# Altium PCB LPKF_ISEN_MAXSIZE_18-05-2016.PCBDOC
Units mm, origin at the board's own origin, x right, y up, seen from the top; angles counter-clockwise.
Board outline 299.72 x 199.9 mm, 2 copper layers (Top Layer, Bottom Layer); 32 components, 16 nets, 110 pads, 0 vias.
Unrouted connection lines stored in the file: 4.
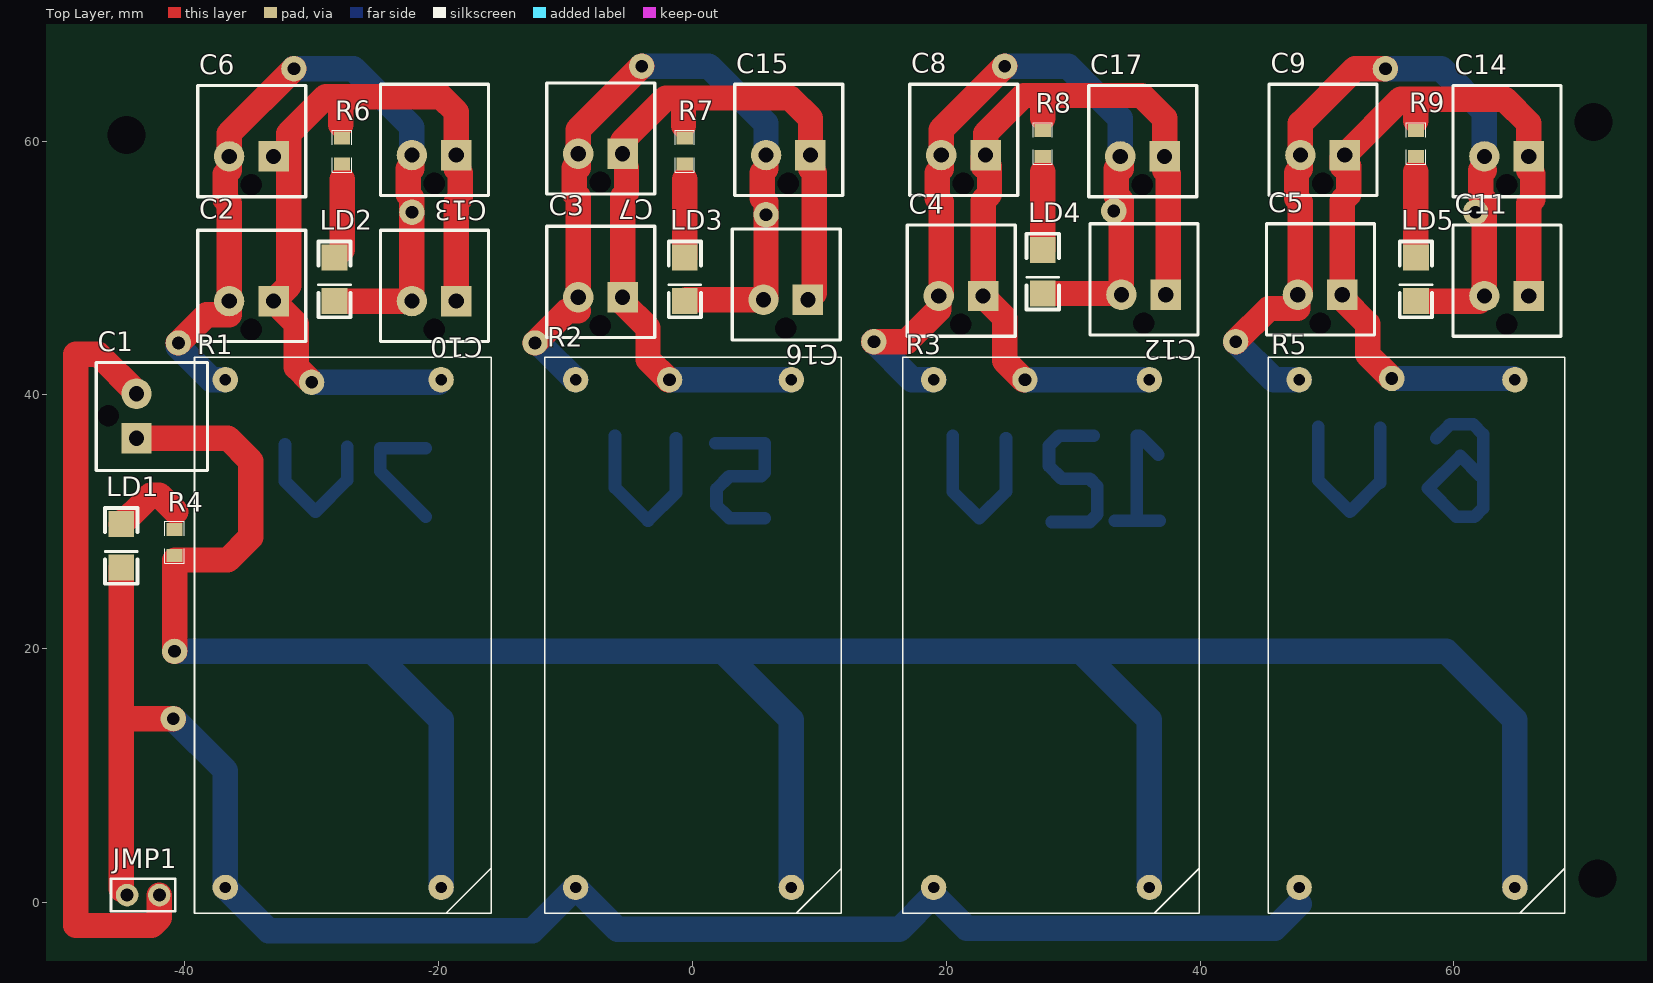
[diagram p0: Top Layer view]
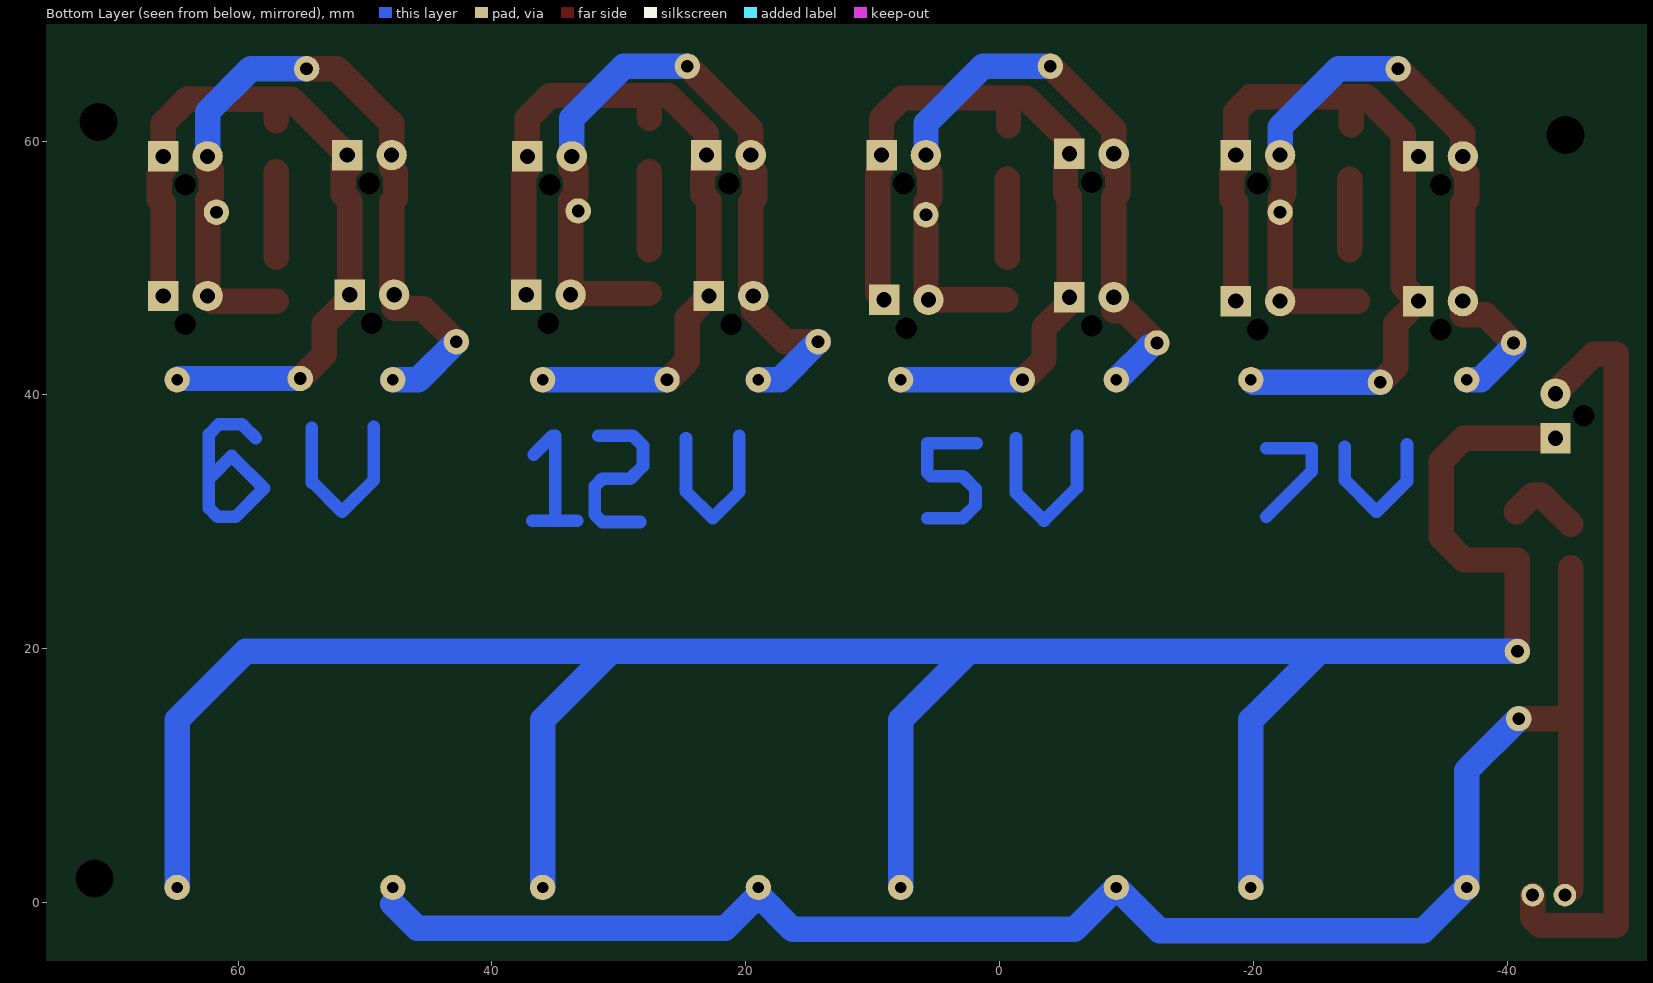
[diagram p1: Bottom Layer view, seen from below]

## Layer stack, top to bottom
Top Solder: solder mask 0.0102, Solder Resist, Dk 3.5
Top Layer: signal copper 0.0356
Dielectric1: dielectric 0.32, FR-4, Dk 4.8
Bottom Layer: signal copper 0.0356
Bottom Solder: solder mask 0.0102, Solder Resist, Dk 3.5

## Board outline
-141.655,-46.39 158.065,-46.39 158.065,153.508 -141.655,153.508

## Design rules (kind name [scope] priority, off if disabled: settings)
Clearance Clearance_bottom_polygon [OnLayer('Bottom Layer') Or OnLayer('Multi-Layer') vs OnLayer('Bottom Layer')  And  InPoly] p1: gap=0.508
Clearance Clearance_top_polygon [OnLayer('Top Layer')  Or OnLayer('Multi-Layer') vs OnLayer('Top Layer') And InPoly] p2: gap=0.508
Clearance Clearance_bottom [OnLayer('Bottom Layer') Or OnLayer('Multi-Layer') vs OnLayer('Bottom Layer')  And Not InPoly] p3: gap=0.203
Clearance Clearance_top [OnLayer('Top Layer')  Or OnLayer('Multi-Layer') vs OnLayer('Top Layer') And Not InPoly] p4: gap=0.203
Clearance Clearance_pad_to_pad [OnLayer('Multi-Layer') vs OnLayer('Multi-Layer')] p5: gap=0.254
ComponentClearance ComponentClearance_bottom [OnLayer('Bottom Overlay') vs OnLayer('Bottom Overlay')] p1: gap=0 collisioncheckmode=3 verticalgap=0.254 showdistances=FALSE
ComponentClearance ComponentClearance_top [OnLayer('Top Overlay') vs OnLayer('Top Overlay')] p2: gap=0 collisioncheckmode=3 verticalgap=0.254 showdistances=FALSE
FabricationTestPointUsage TestPointUsage [All] p1: valid=0 allowmultiple=FALSE
FabricationTestpoint Testpoint [All] p1: side=3 testpointundercomponent=TRUE minsize=1.016 maxsize=2.54 preferedsize=1.524 minholesize=0 maxholesize=1.016 preferedholesize=0.813 testpointgrid=0.025 allowsidetop=TRUE allowsidebottom=TRUE usegrid=TRUE gridtolerance=0
HoleSize [All] p1: absolutevalues=TRUE maxlimit=25.4 minlimit=0.406 maxpercent=80.000 minpercent=20.000
MinimumAnnularRing [PadXSize_AllLayers = PadYSize_AllLayers] p1: minimumring=0.254
PermittedLayers [All] p1: toplayerpermitted=TRUE bottomlayerpermitted=TRUE
PolygonConnect [All] p1: connectstyle=Relief reliefconductorwidth=0.61 reliefentries=4 polygonreliefangle="90 Angle" airgapwidth=0.254
RoutingVias [All] p1: holewidth=0.406 width=0.813 viastyle="Through Hole" minholewidth=0.4 minwidth=0.8 maxholewidth=0.6 maxwidth=10
SMDToPlane [All] p1: distance=0
SolderMaskExpansion [All] p1: expansion=0.102
ViasUnderSMD [All] p1: allowed=FALSE
Width Width_botom_top [OnLayer('Bottom Layer') or OnLayer('Top Layer')] p1: maxlimit=254 minlimit=0.254 preferedwidth=0.813 minimp=50.000000 maximp=50.000000 favimp=50.000000
26 further rules are at their usual default settings.

## Components (designator, comment, footprint, x,y, rotation, side; value= is the part's Value field where it differs from the comment)
C1 "Embase" POWER__2 -43.8,36.6 r90 top
C2 "Embase" POWER__2 -33,47.4 r180 top
C3 "Embase" POWER__2 -5.5,47.7 r180 top
C4 "Embase" POWER__2 22.9,47.8 r180 top
C5 "Embase" POWER__2 51.2,47.9 r180 top
C6 "Embase" POWER__2 -33,58.8 r180 top
C7 "Embase" POWER__2 -5.5,59 r180 top
C8 "Embase" POWER__2 23.1,58.9 r180 top
C9 "Embase" POWER__2 51.4,58.9 r180 top
C10 "Embase" POWER__2 -18.6,47.4 r180 top
C11 "Embase" POWER__2 65.9,47.8 r180 top
C12 "Embase" POWER__2 37.3,47.9 r180 top
C13 "Embase" POWER__2 -18.6,58.9 r180 top
C14 "Embase" POWER__2 65.9,58.8 r180 top
C15 "Embase" POWER__2 9.3,58.9 r180 top
C16 "Embase" POWER__2 9.1,47.5 r180 top
C17 "Embase" POWER__2 37.2,58.8 r180 top
JMP1 "JUMPER2" JMP2-100 -42,0.6 r180 top
LD1 "Bleue" LED1206 -45,26.4 r90 top
LD2 "comment" LED1206 -28.2,47.4 r90 top
LD3 "comment" LED1206 -0.6,47.4 r90 top
LD4 "comment" LED1206 27.6,48 r90 top
LD5 "comment" LED1206 57,47.4 r90 top
R1 "Régulateur" RéGULATEUR -19.8,1.2 r180 top
R2 "Régulateur" Régulateur 7.8,1.2 r180 top
R3 "Régulateur" RéGULATEUR 36,1.2 r180 top
R4 "" 0805 -40.8,29.4 r270 top
R5 "Régulateur" RéGULATEUR 64.8,1.2 r180 top
R6 "RES" 0805 -27.6,58.2 r90 top
R7 "RES" 0805 -0.6,58.2 r90 top
R8 "RES" 0805 27.6,58.8 r90 top
R9 "RES" 0805 57,58.8 r90 top

## Footprints (in the part's own frame and the unit in brackets; to place one, negate y for a bottom-side part, rotate by r counter-clockwise, add the part's x,y. Pads: shape width x height; smd on the part's side, far side on the other; paste and mask are expansions set on the pad)
0805 [mil]
  rect 40x50 smd: 1(0,0) 2(80,0)
  silkscreen extent -25,-30 105,30
JMP2-100 [mil]
  round 70 hole 40: 1(0,0) 2(100,0)
  silkscreen extent -50,-50 150,50
LED1206 [mil]
  rect 80x80 smd: A(135,0) K(0,0)
  silkscreen extent -50,-50 185,50
POWER__2 [mm] "Embase 895-1836"
  rect 2.4x2.4 hole 1.2: 1(0,0)
  round 2.4 hole 1.2: 2(3.5,0)
  round 0 hole 1.7: 3(1.75,2.24)
  silkscreen extent -2.54,-5.59 5.97,3.18
RéGULATEUR [mm]
  round 2 hole 0.9: 1(0,0) 2(17,0) 3(17,-40) 4(0,-40)
  silkscreen extent -3.94,-41.78 19.43,2.03
Régulateur [mm]
  round 2 hole 0.9: 1(0,0) 2(17,0) 3(17,-40) 4(0,-40)
  silkscreen extent -3.94,-41.78 19.43,2.03

## Part data
C1 C2 C3 C4 C5 C6 C7 C8 C9 C10 C11 C12 C13 C14 C15 C16 C17: "Embase 2 broches"
JMP1: "cavalier 1 position"
LD1 LD2 LD3 LD4 LD5: library part LED, "LED 5mm/3mm/CMS"
R1 R2 R3 R5: "Régulateur de tension"
R4: library part RES, "resistance"
R6 R7 R8 R9: "resistance"

## Free pads (board coordinates)
  round 1.524 hole 3: 0(-44.6,60.5) 3(71.3,1.9) 4(71,61.5)
  round 2 hole 1: 4(-40.8,19.8) 9(-22.1,54.4) 11(5.8,54.2) 12(33.2,54.5) 13(61.7,54.4) 14(54.6,65.7) 15(24.6,65.9) 16(-31.397,65.703) 17(-4,65.9) 25(-40.9,14.5) 26(-30,41) 27(-1.8,41.2) 28(26.2,41.2) 29(55.1,41.3) 30(-40.497,44.1) 31(-12.4,44.1) 32(14.3,44.2) 33(42.8,44.2)

## Nets (pads, with @x,y where several pads share a name; then routed paths per layer and width w, separated by ;. In a path a pad name is that pad's centre, name@x,y a point inside that pad or via, vN(x,y) a via of type N, cw(c..) or ccw(c..) an arc to the next point about the centre after c; other vN are vias at no path point)
NetC1_1: C1.1 pad.4@-40.8,19.8 R1.1 R2.1 R3.1 R4.2 R5.1 | length 213.2
  Top Layer w2: C1.1 -36.6,36.6 -34.8,34.8 -34.8,28.8 -36.6,27 -40.8,27 pad.4@-40.8,19.8
  Bottom Layer w2: pad.4@-40.8,19.8 -25.2,19.8 ; R1.1 -19.8,14.4 -25.2,19.8 ; R2.1 7.8,14.4 2.4,19.8 ; R3.1 36,14.4 30.6,19.8 ; R5.1 64.8,14.4 59.4,19.8 30.6,19.8 ; -25.2,19.8 2.4,19.8 ; 2.4,19.8 30.6,19.8
NetC1_2: C1.2 JMP1.1 | length 59.9
  Top Layer w2: C1.2 -43.7,40.1 -46.8,43.2 -48.6,43.2 -48.6,-1.8 -42.6,-1.8 -42,-1.2 JMP1.1
NetJMP1_2: JMP1.2 LD1.K pad.25 | length 136.2
  Top Layer w2: JMP1.2@-45,1.06 -45,14.5 ; LD1.K -45,14.5 ; pad.25 -45,14.5
  Bottom Layer w2: pad.25 -36.8,10.4 -36.8,1.2 -33.4,-2.2 -12.6,-2.2 -9.2,1.2 -5.9,-2.1 16.3,-2.1 19,0.6 21.6,-2 45.9,-2 47.8,-0.1
NetLD1_A: LD1.A R4.1 | length 5.8
  Top Layer w2: LD1.A -44.229,30.6 -44.2,30.6 -42.7,32.1 -42,32.1 -40.7,30.8
NetLD2_A: LD2.A R6.1 | length 5.6
  Top Layer w2: LD2.A@-27.6,51.429 -27.6,57
NetLD3_A: LD3.A R7.1 | length 6.2
  Top Layer w2: LD3.A -0.6,57
NetLD4_A: LD4.A R8.1 | length 6.2
  Top Layer w2: LD4.A 27.6,57.6
NetLD5_A: LD5.A R9.1 | length 6.8
  Top Layer w2: LD5.A 57,57.6
R1+: C2.1 C6.1 C10.1 C13.1 pad.26 R1.4 R6.2 | length 63.3
  Top Layer w2: pad.26@-30.2,41.2 -31.2,42.2 -31.2,45.6 C2.1 -31.8,48.6 -31.8,60.6 -28.9,63.5 -27.7,63.5 ; -27.7,61.3 -27.7,63.5 ; C10.1 -18.6,55.203 -18.297,55.506 -18.297,57.51 -18.6,57.814 C13.1 -18.6,62.3 -19.8,63.5 -27.7,63.5
  Bottom Layer w2: pad.26 R1.4@-20,41
R1-: C2.2 C6.2 C10.2 C13.2 LD2.K pad.9 pad.16 pad.30 R1.2 | length 63.2
  Top Layer w2: pad.30 -38.283,46.314 -36.5,46.314 C2.2 -36.5,55.103 -36.803,55.406 -36.803,57.41 -36.5,57.714 C6.2 -36.5,60.6 pad.16 ; LD2.K C10.2 -22.1,55.506 -22.403,55.81 -22.403,57.814 -22.1,57.814 C13.2
  Bottom Layer w2: pad.30 -40.497,43.8 -37.897,41.2 -36.8,41.2 ; pad.16 -26.703,65.703 -22.1,61.1 C13.2
R2+: C3.1 C7.1 C15.1 C16.1 pad.27 R2.4 R7.2 | length 61.9
  Top Layer w2: C7.1 -5.5,60 -2.1,63.4 -0.7,63.4 ; C7.1@-5.197,57.914 -5.197,55.91 -5.5,55.606 C3.1 -5.5,47.3 -3.5,45.3 -3.5,42.8 pad.27@-1.9,41.2 ; -0.7,61.2 -0.7,63.4 ; C16.1@9.603,48.003 9.603,57.51 9.3,57.814 C15.1 9.3,61.8 7.7,63.4 -0.7,63.4
  Bottom Layer w2: pad.27 R2.4
R2-: C3.2 C7.2 C15.2 C16.2 LD3.K pad.11 pad.17 pad.31 R2.2 | length 60.8
  Top Layer w2: pad.31 -9.886,46.614 C3.2@-9,46.614 ; C3.2 -9,55.606 -9.303,55.91 -9.303,57.914 -9,57.914 C7.2 -9,60.9 pad.17 ; LD3.K@-0.5,47.5 C16.2 5.8,47.7 5.8,55.203 5.497,55.506 5.497,57.51 5.8,57.814 C15.2
  Bottom Layer w2: pad.31@-11.797,43.797 -9.2,41.2 ; pad.17 1.3,65.9 5.8,61.4 C15.2
R3+: C4.1 C8.1 C12.1 C17.1 pad.28 R3.4 R8.2 | length 63.2
  Top Layer w2: pad.28@26.1,41.2 24.6,42.7 24.6,46.1 C4.1 22.9,55.306 23.403,55.81 23.403,58.014 22.9,58.014 22.9,58.7 C8.1 23.1,60.6 26.1,63.6 27.6,63.6 ; 27.6,61.8 27.6,63.6 ; C12.1@37.503,47.9 37.503,57.41 37.2,57.714 C17.1 37.2,61.8 35.4,63.6 27.6,63.6
  Bottom Layer w2: pad.28 R3.4
R3-: C4.2 C8.2 C12.2 C17.2 LD4.K pad.12 pad.15 pad.32 R3.2 | length 65.2
  Top Layer w2: pad.32 16.886,44.2 19.4,46.714 C4.2 19.6,48 19.6,55.203 19.297,55.506 19.297,57.51 19.6,57.814 C8.2 19.6,60.9 pad.15 ; LD4.K 33.7,48 C12.2 33.8,55.306 33.397,55.71 33.397,57.814 33.8,57.814 33.8,58.7 C17.2
  Bottom Layer w2: pad.32 17.3,41.2 19,41.2 ; pad.15 29.6,65.9 33.7,61.8 C17.2
R4+: C5.1 C9.1 C11.1 C14.1 pad.29 R5.4 R9.2 | length 62.1
  Top Layer w2: pad.29@55,41.4 53.2,43.2 53.2,45.6 51.2,47.6 C5.1 51.2,55.306 51.703,55.81 51.703,58.014 51.2,58.014 51.2,58.7 C9.1 55.8,63.3 57,63.3 ; 57,61.6 57,63.3 ; C11.1 65.9,55.103 66.203,55.406 66.203,57.41 65.9,57.714 C14.1 65.9,61.4 64,63.3 57,63.3
  Bottom Layer w2: pad.29 R5.4@64.7,41.3
R4-: C5.2 C9.2 C11.2 C14.2 LD5.K pad.13 pad.14 pad.33 R5.2 | length 64.2
  Top Layer w2: pad.33 45.414,46.814 47.7,46.814 C5.2 47.9,48.1 47.9,55.203 47.597,55.506 47.597,57.51 47.9,57.814 C9.2 47.9,61.4 52.2,65.7 pad.14 ; LD5.K 62,47.4 C11.2 62.4,55.406 62.097,55.71 62.097,57.714 C14.2@62.4,57.714
  Bottom Layer w2: pad.33 45.8,41.2 47.8,41.2 ; pad.14 59,65.7 62.4,62.3 C14.2
pads on no net: C1.3 C2.3 C3.3 C4.3 C5.3 C6.3 C7.3 C8.3 C9.3 C10.3 C11.3 C12.3 C13.3 C14.3 C15.3 C16.3 C17.3 R1.3 R2.3 R3.3 R5.3
copper on no net: | length 138
  Bottom Layer w1: -32.1,36.1 -32.1,33.5 -32.1,33.2 -29.7,30.8 -27.2,33.3 -27.2,34.5 -27.2,35.9 ; -21,30.4 -24.6,34 -24.6,35.8 -21,35.8 ; -6.1,36.8 -6.1,32.7 -3.5,30.1 -1.3,32.3 -1.3,33.8 ; -1.3,35.8 -1.3,33.8 ; -1.3,36.6 -1.3,33.8 ; 1.8,36.2 5.7,36.2 5.7,33.9 5.4,33.6 2.9,33.6 1.9,32.6 1.9,31.3 2.7,30.5 2.9,30.3 5.7,30.3 ; 20.5,36.8 20.5,32.4 22.6,30.3 24.7,32.4 24.7,36.6 ; 28.3,30 29.2,30 29.3,30 31.3,30 31.9,30.6 31.9,31.5 31.9,32.8 31.3,33.4 29.1,33.4 28.1,34.4 28.1,36 28.9,36.8 31.6,36.8 ; 36.7,35.3 35.2,36.8 35,36.8 35,30.1 33.3,30.1 36.8,30.1 ; 49.3,37.5 49.3,33.3 51.8,30.8 54.1,33.1 54.2,33.1 54.2,37.4 ; 58.6,36.6 59.6,37.6 59.7,37.7 61.5,37.7 62.3,36.9 62.3,31.1 61.6,30.4 60.2,30.4 57.95,32.65 60.5,35.2 62.1,33.6

## Keep-outs
Keep-Out Layer:
  rectangle: -135.695,152.27 149.305,157.27
  rectangle: 149.305,-37.73 154.305,157.27
  rectangle: -135.695,-42.73 154.305,-37.73
  rectangle: -140.695,-42.73 -135.695,157.27

## Silkscreen, mask and mechanical layers (free items; w line width, h text height)
Top Overlay:
  text "Les bandes en violet delimitent la surface utilisable...." at -144.907,179.832 h6.35
  text "Mais vous n'etes pas obliges de tout utiliser!!" at -128.651,169.545 h6.35
Mechanical 1:
  lines w0.254: -52.3,-4.6 -52.3,47.4 -52.3,49.4 -51.9,49.8 -49.1,49.8 -49.1,67.1 -49.1,68.4 73.7,68.4 73.7,-4.6 -52.3,-4.6